# Altium PCB pcb.PcbDoc
Units mm, origin at the board's own origin, x right, y up, seen from the top; angles counter-clockwise.
Board outline 98.75 x 72 mm, 2 copper layers (Top Layer, Bottom Layer); 49 components, 41 nets, 141 pads, 26 vias.
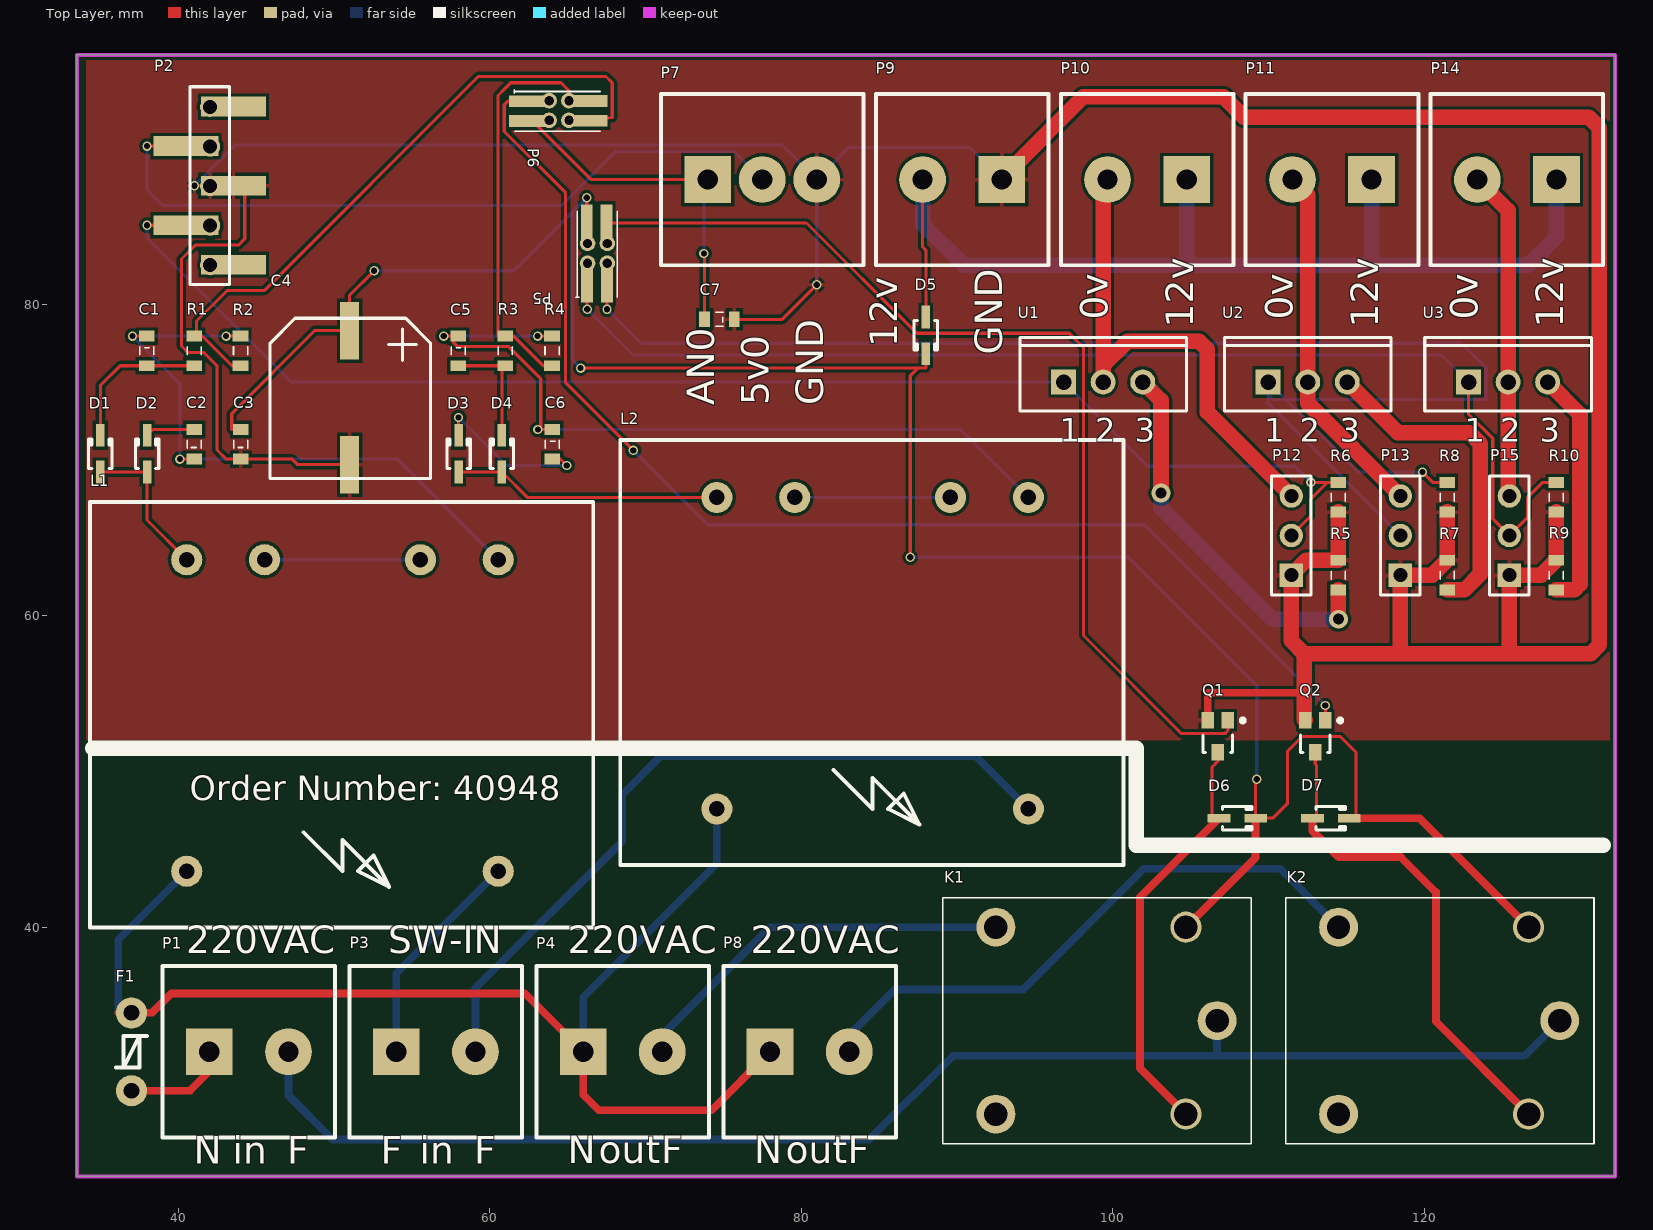
[diagram p0: Top Layer view]
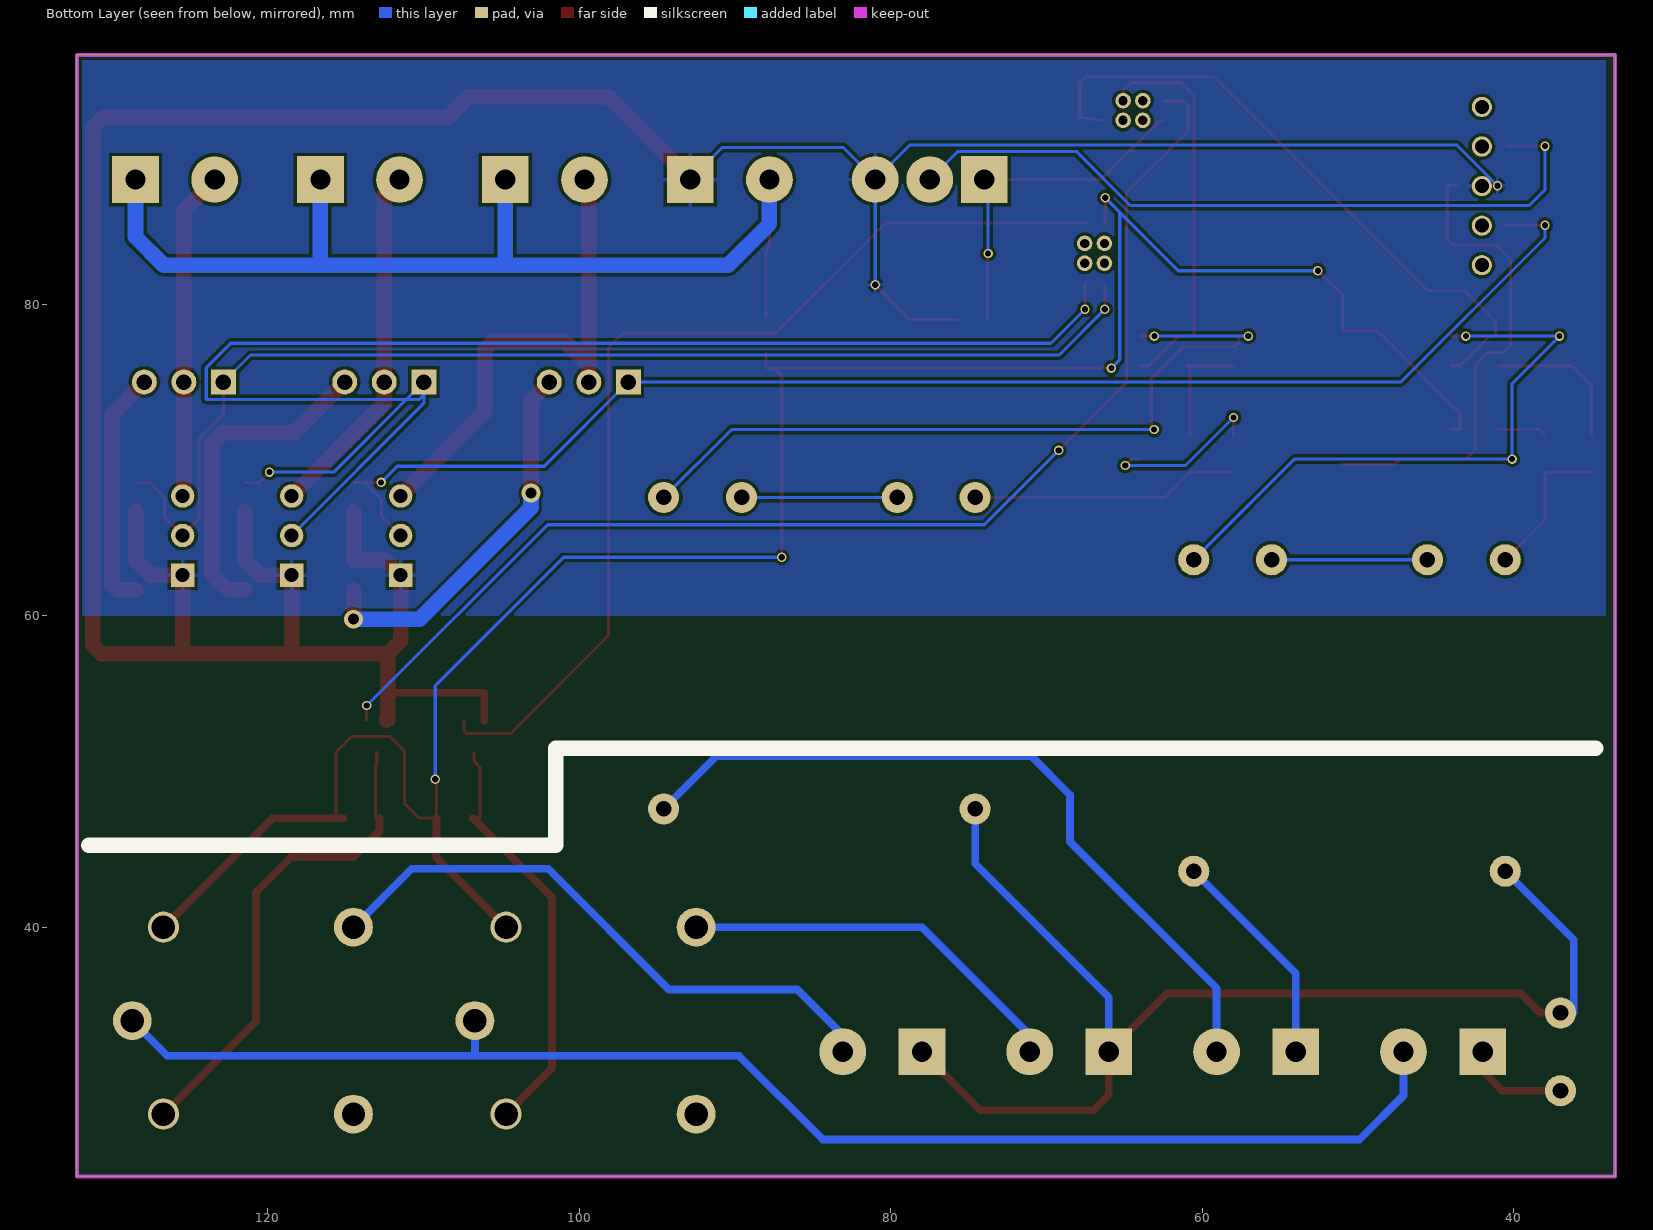
[diagram p1: Bottom Layer view, seen from below]
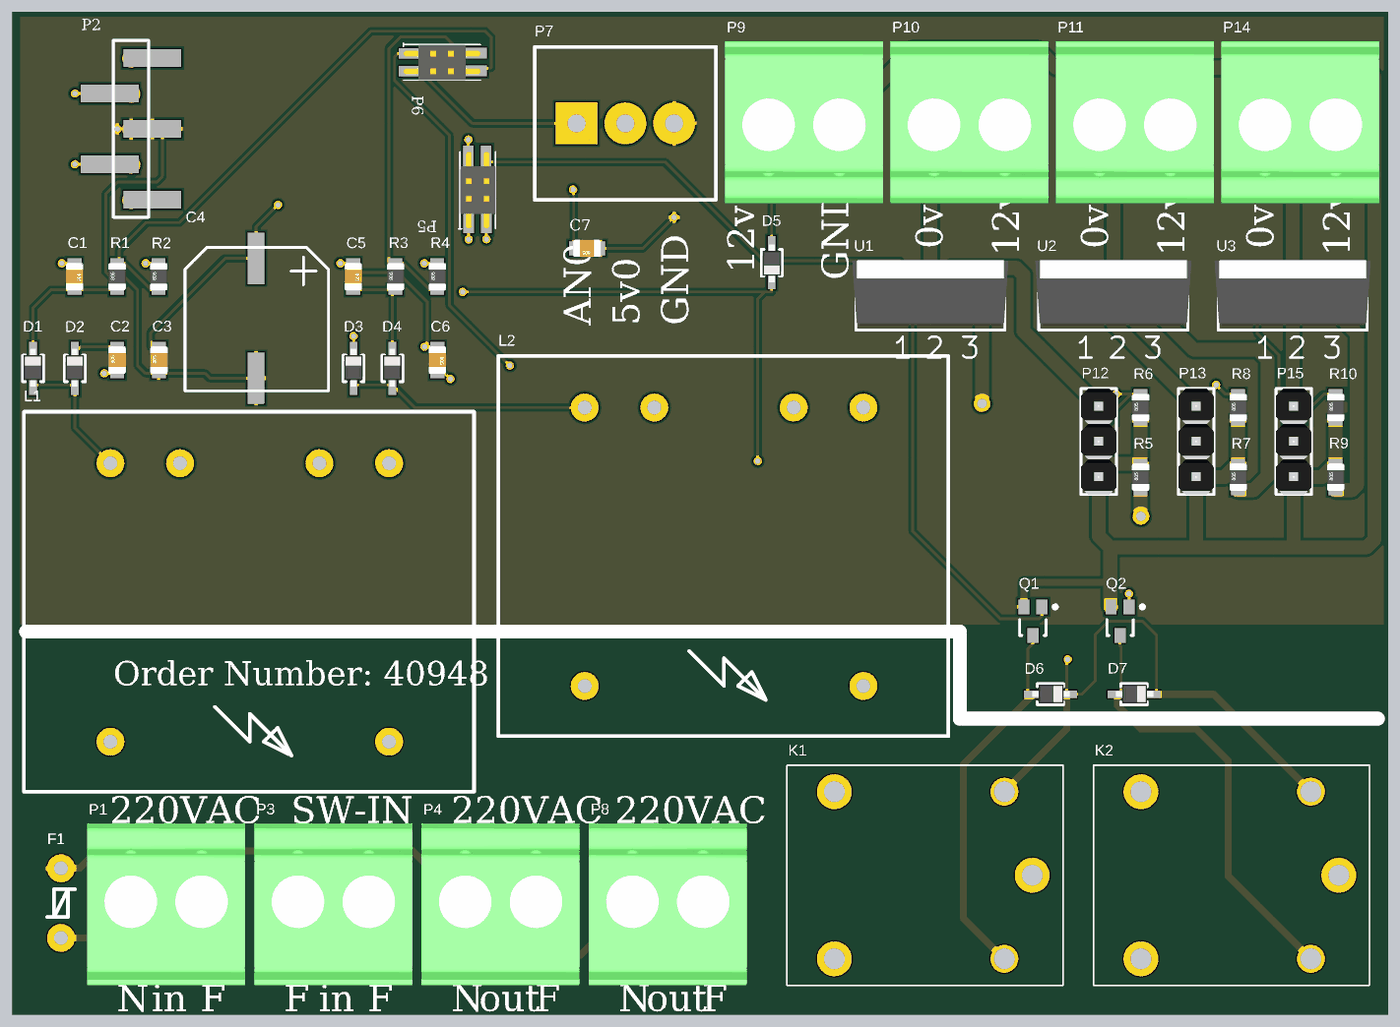
[diagram p2: 3D render of the assembled board from above, using the file's embedded part models]

## Layer stack, top to bottom
Top Layer: signal copper 0.0356
Dielectric: dielectric 0.32, FR-4, Dk 4.8
Bottom Layer: signal copper 0.0356

## Board outline
33.5,24 33.5,96 132.25,96 132.25,24

## Design rules (kind name [scope] priority, off if disabled: settings)
Clearance "Schematic Clearance Constraint_5" [InNet('NetF1_2')] p1: gap=2
Clearance "Schematic Clearance Constraint_4" [InNet('NetP3_2')] p2: gap=2
Clearance "Schematic Clearance Constraint_3" [InNet('HV_NEUTRAL')] p3: gap=2
Clearance "Schematic Clearance Constraint_2" [InNet('HV_FASE_OUT_TRANSFORMER')] p4: gap=2
Clearance "Schematic Clearance Constraint_1" [InNet('HV_FASE')] p5: gap=2
Clearance "Schematic Clearance Constraint" [InNet('NetP3_1')] p6: gap=2
Clearance "Schematic Clearance Constraint_6" [InNet('HV_FASE_OUT_FAN')] p7: gap=2
Clearance [All] p8: gap=0.2
ComponentClearance ComponentClearance_1 [(HasFootprint('TB2x6_5.08') OR HasFootprint('TB2x8_5.08'))] p1: gap=0 collisioncheckmode=3 verticalgap=0 showdistances=FALSE
ComponentClearance [All] p2: gap=0.254 collisioncheckmode=3 verticalgap=0.254 showdistances=FALSE
HoleToHoleClearance [All] p1: gap=0.2 allowstackedmicrovias=TRUE
MinimumAnnularRing [All] p1: minimumring=0.1
MinimumSolderMaskSliver [All] p1: minsoldermaskwidth=0.2
PolygonConnect [All] p1: connectstyle=Relief reliefconductorwidth=0.254 reliefentries=4 polygonreliefangle="90 Angle"
RoomDefinition "schakelaar wc" [InComponentClass('schakelaar wc')] p1: confinementstyle=ConfineIn formatcopy=TRUE lockcomponents=FALSE outline 0,0 50.8,0 50.8,25.4 0,25.4
RoomDefinition "schakelaar badkamer" [InComponentClass('schakelaar badkamer')] p2: confinementstyle=ConfineIn formatcopy=TRUE lockcomponents=FALSE outline 0,0 50.8,0 50.8,25.4 0,25.4
RoomDefinition "VENTILATOR BAD" [InComponentClass('VENTILATOR BAD')] p3: confinementstyle=ConfineIn formatcopy=TRUE lockcomponents=FALSE outline 134,203 176,203 176,220 134,220
RoomDefinition Urel2 [InComponentClass('Urel2')] p4: confinementstyle=ConfineIn formatcopy=TRUE lockcomponents=FALSE outline 134,103 171,103 171,127 134,127
RoomDefinition Urel1 [InComponentClass('Urel1')] p5: confinementstyle=ConfineIn formatcopy=TRUE lockcomponents=FALSE outline 134,78 170,78 170,102 134,102
RoomDefinition main [InComponentClass('main')] p6: confinementstyle=ConfineIn formatcopy=TRUE lockcomponents=FALSE outline 135,28.175 246,28.175 246,44.175 135,44.175
RoomDefinition "LEDS WC" [InComponentClass('LEDS WC')] p7: confinementstyle=ConfineIn formatcopy=TRUE lockcomponents=FALSE outline 78,200.95 120,200.95 120,216.95 78,216.95
RoomDefinition "LEDS BADKAMER" [InComponentClass('LEDS BADKAMER')] p8: confinementstyle=ConfineIn formatcopy=TRUE lockcomponents=FALSE outline 41,158.95 82,158.95 82,174.95 41,174.95
RoutingVias [All] p1: holewidth=0.4 width=0.6 viastyle="Through Hole" minholewidth=0.4 minwidth=0.6 maxholewidth=3 maxwidth=5
SilkToSilkClearance [All] p1: silktosilkclearance=0.2
SilkscreenOverComponentPads [All] p1 off: minsilkscreentomaskgap=0.254
SolderMaskExpansion [All] p1: expansion=0.102
Width [All] p1: maxlimit=16 minlimit=0.2 preferedwidth=0.2
23 further rules are at their usual default settings.

## Classes and differential pairs
component class "VENTILATOR BAD": P10 P12 R5 R6 U1
component class "LEDS WC": P11 P13 R7 R8 U2
component class "LEDS BADKAMER": P14 P15 R9 R10 U3
component class main: C3 C4 C7 D5 F1 P1 P2 P3 P4 P7 P8 P9
channel class schakelaarDetectie: U_schakelaarDetectie1 U_schakelaarDetectie2
component class "schakelaar badkamer": C5 C6 D3 D4 L2 R3 R4
component class "schakelaar wc": C1 C2 D1 D2 L1 R1 R2
component class Urel1: D7 K2 Q2
component class Urel2: D6 K1 Q1
channel class "FET PWM output": FET2 FET3 Ufet1
channel class outputRelay: Urel1 Urel2

## Components (designator, comment, footprint, x,y, rotation, side; value= is the part's Value field where it differs from the comment)
C1 "100n" C0805 38,77 r270 top (schematic designator C4)
C2 "100n" C0805 41,71 r90 top (schematic designator C3)
C3 "2u2" C0805 44,71 r90 top (schematic designator C2)
C4 "330uF" "SMT CASE G" 51,74 r90 top (schematic designator C1)
C5 "100n" C0805 58,77 r270 top (schematic designator C4)
C6 "100n" C0805 64.04,71 r270 top (schematic designator C3)
C7 "100n" C0805 74.75,79 r180 top (schematic designator C100)
D1 "60v 1A" SOD323 35,70.4 r90 top (schematic designator D3)
D2 "60v 1A" SOD323 38,70.4 r90 top
D3 "60v 1A" SOD323 58,70.4 r90 top (schematic designator D2)
D4 "60v 1A" SOD323 60.785,70.4 r90 top (schematic designator D3)
D5 "60v 1A" SOD323 88,78 r270 top (schematic designator D1)
D6 "60v 1A" SOD323 108,47 r0 top (schematic designator D4)
D7 "60v 1A" SOD323 114,47 r0 top (schematic designator D4)
F1 "220VAC 0.4A" Rachem_R8 37,32 r270 top
K1 "Relay SPDT" RELAY-G5LA-1 99,34 r180 top
K2 "Relay SPDT" RELAY-G5LA-1 121,34 r180 top (schematic designator K1)
L1 "transformer_dual_output" transformer_Block_1.5VA 50.546,53.594 r90 top
L2 "transformer_dual_output" transformer_Block_1.5VA 84.582,57.594 r90 top (schematic designator L1)
P1 "HV 220VAC input" TB2_5.08 42,32 r0 top (schematic designator P6)
P2 "Pin Header" "HDR1X5 SMT" 42.025,82.53 r90 top (schematic designator P4)
P3 "HV Buttons inputs (fase)" TB2_5.08 54,32 r0 top (schematic designator P5)
P4 "HV 220VAC output (to transformer 12v)" TB2_5.08 66,32 r0 top (schematic designator P7)
P5 "Pin Header" HDR2X2-SMT-1.27 66.255,81.307 r0 top (schematic designator P1)
P6 "Pin Header" HDR2X2-SMT-1.27 62.45,93.03 r270 top (schematic designator P3)
P7 "HUMIDITY SENSOR" TB3_3.5 74,88 r0 top (schematic designator P2)
P8 "HV 220VAC output to FAN" TB2_5.08 78,32 r0 top (schematic designator P9)
P9 "12v geschakeld IN" TB2_5.08 92.873,88 r180 top (schematic designator P8)
P10 "12v PWM out" TB2_5.08 104.746,88 r180 top
P11 "12v PWM out" TB2_5.08 116.619,88 r180 top (schematic designator P10)
P12 "Pin Header" PH1x3_2.54 111.468,62.607 r90 top (schematic designator P11)
P13 "Pin Header" PH1x3_2.54 118.468,62.607 r90 top (schematic designator P11)
P14 "12v PWM out" TB2_5.08 128.492,88 r180 top (schematic designator P10)
P15 "Pin Header" PH1x3_2.54 125.468,62.607 r90 top (schematic designator P11)
Q1 "w/internal Res" SOT-323-NPN 106.75,52.25 r180 top
Q2 "w/internal Res" SOT-323-NPN 113,52.25 r180 top (schematic designator Q1)
R1 "RESISTOR" R0805 41.02,77 r90 top
R2 "RESISTOR" R0805 44,77 r90 top
R3 "RESISTOR" R0805 61,77 r90 top (schematic designator R1)
R4 "RESISTOR" R0805 64,77 r90 top (schematic designator R2)
R5 "RESISTOR" R0805 114.468,62.607 r90 top (schematic designator R4)
R6 "RESISTOR" R0805 114.468,67.607 r90 top (schematic designator R3)
R7 "RESISTOR" R0805 121.468,62.607 r90 top (schematic designator R4)
R8 "RESISTOR" R0805 121.468,67.607 r90 top (schematic designator R3)
R9 "RESISTOR" R0805 128.468,62.607 r90 top (schematic designator R4)
R10 "RESISTOR" R0805 128.468,67.607 r90 top (schematic designator R3)
U1 "IRF540PBF" TO-220AB 99.387,75 r0 top
U2 "IRF540PBF" TO-220AB 112.52,75 r0 top (schematic designator U1)
U3 "IRF540PBF" TO-220AB 125.387,75 r0 top (schematic designator U1)

## Footprints (in the part's own frame and the unit in brackets; to place one, negate y for a bottom-side part, rotate by r counter-clockwise, add the part's x,y. Pads: shape width x height; smd on the part's side, far side on the other; paste and mask are expansions set on the pad)
C0805 [mm] "Chip Capacitor; Body 2.0 x 1.2 mm (LxW typ)"
  rect 0.7x1 smd: 1(-0.95,-0.025) 2(0.95,-0.025)
  silkscreen extent -0.25,-0.48 0.25,0.43, body extent -1,-0.65 1,0.6, height 0.78
"HDR1X5 SMT" [mil] "Connector; Header; 5 Position; SMT"
  rect 50x163.39 smd: 1(400,-60) 2(300,60) 3(200,-60) 4(100,60) 5(0,-60)
  silkscreen extent -50,-50 450,50
HDR2X2-SMT-1.27 [mm]
  rect 0.76x2.4 smd: 1(0,0) 2(-0.025,3.9) 3(1.275,0) 4(1.25,3.9)
  silkscreen extent -0.73,-0.87 1.93,4.65, body extent -0.62,-0.85 1.92,4.65, height 4.5
PH1x3_2.54 [mm] "Connector; Header; 3 Position"
  rect 1.5x1.5 hole 0.9: 1(0,0)
  round 1.5 hole 0.9: 2(2.54,0) 3(5.08,0)
  silkscreen extent -1.27,-1.27 6.35,1.27, body extent -1.27,-1.27 6.35,1.27, height 8.38
R0805 [mm] "0805 SMD Resistor"
  rect 0.7x1 smd: 1(-0.95,0) 2(0.95,0)
  silkscreen extent -0.25,-0.45 0.25,0.45, body extent -1.01,-0.63 0.99,0.62, height 0.78
Rachem_R8 [mm]
  round 2 hole 1: 1(-2.5,0) 2(2.5,0)
  silkscreen extent -1,-1 1,1
RELAY-G5LA-1 [mm] "Relay"
  round 2.5 hole 1.5: 1(-7.7,0) 2(6.5,6) 3(6.5,-6)
  round 2 hole 1.5: 4(-5.7,6) 5(-5.7,-6)
  silkscreen extent -9.9,-7.9 9.9,7.9, body extent -9.8,-7.8 9.8,7.8, height 15.8
"SMT CASE G" [mm]
  rect 3.7x1.2 smd: 1(-4.3,0) 2(4.3,0)
  silkscreen extent -5.2,-5.2 5.1,5.1
SOD323 [mm] "SOD-323/SC-76; 2 Leads; Body 1.7 x 1.3 mm, (LxW)"
  rect 1.45x0.55 smd: 1(-1.175,0) 2(1.175,0)
  silkscreen extent -0.95,-0.75 0.95,0.75, body extent -1.3,-0.66 1.4,0.69, height 0.79
SOT-323-NPN [mm] "SOT-323/SC-70; 3 Leads; Body 2.2 x 2.2 mm, inc. leads (LxW max)"
  rect 0.8x1.05 smd: B(-0.65,-1.025) C(0,1.025) E(0.65,-1.025)
  silkscreen extent -1.73,-1.15 0.95,1.03
TB2_5.08 [mm] "Terminal Block 2 Pin 5.08"
  rect 3x3 hole 1.3: 1(0,0)
  round 3 hole 1.3: 2(5.08,0)
  silkscreen extent -3,-5.5 8.08,5.5, body extent -3.12,-5.9 8.22,5.72, height 18
TB3_3.5 [mm] "Terminal Block 3 Pin 3.5mm"
  rect 3x3 hole 1.3: 1(0,0)
  round 3 hole 1.3: 2(3.5,0) 3(7,0)
  silkscreen extent -3,-5.5 10,5.5, body extent -3,-5.5 10,5.5, height 12.8
TO-220AB [mm] "TO, Thru-Hole, Vertical, Heatsink Mounted; 3 In-Line Leads; Pitch 2.54 mm"
  rect 1.6x1.6 hole 1: 1(-2.54,0)
  round 1.6 hole 1: 2(0,0) 3(2.54,0)
  silkscreen extent -5.35,-1.85 5.35,2.85, body extent -5.61,-1.52 5.61,3.17, height 19.33
transformer_Block_1.5VA [mm]
  round 2 hole 1: 1(-10,10) 2(-10,-10) 3(10,-10) 4(10,-5) 5(10,5) 6(10,10)
  silkscreen extent -13.6,-16.1 13.7,16.2

## Part data
C4: library part 330uF-Electrolytic, "Capacitor"
D1 D2 D3 D4 D5 D6 D7: library part PMEG6010CEJ
F1: library part LVR040K, "Fuse"
K1 K2: library part G5LA-14, "Relay, Single-Pole Dual-Throw Relay"
L1 L2: library part transformer_220VAC, "Inductor"
P1 P3 P4 P8 P9 P10 P11 P14: library part TB2, "Con1x2"
P2: library part "PH1x5 SMT", "Con1x5"
P5 P6: library part PH2x2-SMT-1.27, "Header, 2-Pin, Dual row"
P7: library part TB3, "Con1x3"
P12 P13 P15: library part PH1x3, "Con1x3"
Q1 Q2: library part PDTC124TU, "Transistor"
R1 R3 R6 R8 R10: library part 10K, "Resistor"
R2 R4: library part 5K6, "Resistor"
R5 R7 R9: library part 0R, "Resistor"
U1 U2 U3: "Transistor"

## Free pads (board coordinates)
  round 1 hole 0.6: 1(65.086,91.799) 1(67.55,82.63) 2(63.816,91.799) 2(66.28,82.63) 3(65.086,93.069) 3(66.28,83.9) 3(67.55,83.9) 4(63.816,93.069)
  round 1.3 hole 0.9: 5(42.048,82.503) 6(42.048,85.043) 7(42.048,87.583) 8(42.048,90.123) 9(42.048,92.663)

## Via types
v1: diameter 0.6, hole 0.4, Top Layer to Bottom Layer, 24 vias
v2: diameter 1.2, hole 0.7, Top Layer to Bottom Layer, 2 vias

## Nets (pads, with @x,y where several pads share a name; then routed paths per layer and width w, separated by ;. In a path a pad name is that pad's centre, name@x,y a point inside that pad or via, vN(x,y) a via of type N, cw(c..) or ccw(c..) an arc to the next point about the centre after c; other vN are vias at no path point)
5V0: P2.2 P7.2 pad.8 | length 47.4
  Top Layer w0.2: v1(37.998,90.15) P2.2
  Bottom Layer w0.2: v1(37.998,90.15) 37.998,87.351 39.014,86.335 64.614,86.335 68.093,89.814 75.686,89.814 P7.2
12V: C3.2 C4.2 D5.2 D6.2 D7.2 K1.5 K2.5 P5.2 pad.3@66.28,83.9 | length 154.5
  Top Layer w0.2: C3.2 43.434,71.95 43.434,72.974 48.768,78.308 C4.2@51,78.308 ; C4.2 C4.2@51,78.308 ; v1(52.578,82.144) 51,80.566 C4.2@51,78.308 ; v1(65.837,75.895) 87.5,75.895 ; P5.2 v1(66.23,86.834) ; v1(87,63.75) 87,75.395 87.5,75.895 ; D5.2 88,75.895 87.5,75.895 ; 109.175,44.475 D6.2 ; v1(109.25,49.5) 109.175,49.425 D6.2 ; D7.2 115.621,47 115.621,51.232 114.605,52.248 112.166,52.248 111.227,51.308 111.227,47.955 110.271,47 D6.2
  Top Layer w0.5: K1.5 109.175,44.475 D6.2 ; D7.2 119.7,47 K2.5
  Bottom Layer w0.2: v1(52.578,82.144) 61.54,82.144 v1(66.23,86.834) ; 65.3,85.904 65.3,76.432 v1(65.837,75.895) ; v1(87,63.75) 101,63.75 109.25,55.5 v1(109.25,49.5)
"12V_schakelaar badkamer": C6.2 D3.2 | length 10.5
  Top Layer w0.2: D3.2 v1(58,72.72) ; C6.2 64.545,70.05 v1(64.948,69.647)
  Bottom Layer w0.2: v1(58,72.72) 61.073,69.647 v1(64.948,69.647)
"12V_schakelaar wc": C2.2 D2.2 | length 3.2
  Top Layer w0.2: D2.2 38.375,71.95 C2.2
12VRAW: D5.1 P9.2 P10.1 P11.1 P14.1 | length 68.7
  Top Layer w0.2: P9.2 87.793,83.671 88,83.464 D5.1
  Bottom Layer w1: P9.2 87.793,85.157 90.45,82.5 126.675,82.5 128.492,84.317 P14.1 ; 104.746,82.671 P10.1 ; 116.619,82.631 P11.1
AN9/RB15: P6.4 pad.1@65.086,91.799 R1.2 R2.1 | length 41.9
  Top Layer w0.2: R1.2 R1.2@41.173,77.95 ; R2.1 43.454,76.05 41.554,77.95 R1.2@41.173,77.95 ; P6.4 67.869,91.983 67.869,94.209 67.462,94.615 59.258,94.615 45.517,80.874 43.129,80.874 41.173,78.918 R1.2@41.173,77.95
AN10/INT1/RB14: P6.2 pad.3@65.086,93.069 R3.2 R4.1 | length 25.4
  Top Layer w0.2: R4.1 63.444,76.05 61.544,77.95 R3.2 60.528,77.95 60.528,93.396 60.96,93.828 61.347,94.215 64.575,94.215 65.086,93.704 pad.3@65.086,93.069
DONOTUSE1: P2.1 pad.9
GND: C3.1 C4.1 C7.1 P2.3 P7.3 P9.1 P12.1 P13.1 P15.1 pad.7 Q1.E Q2.E R5.2 R6.1 R7.2 R8.1 R9.2 R10.1 | length 244.4
  Top Layer w0.2: v1(41.046,87.605) 41.052,87.61 P2.3@42.951,87.61 ; P2.3 44.275,87.61 44.275,84.2 43.87,83.795 41.097,83.795 40.208,82.906 40.208,77.318 40.64,76.886 41.656,76.886 42.494,76.048 42.494,70.634 43.078,70.05 C3.1 47.32,70.05 47.67,69.7 C4.1 ; C7.1 78.775,79.025 v1(81,81.25)
  Top Layer w0.5: Q1.E 106.1,55.05 111.875,55.05 112.3,54.625 112.35,54.575 Q2.E
  Top Layer w1: P9.1 92.873,88.073 98.125,93.325 107.1,93.325 108.425,92 130.575,92 131.25,91.325 131.25,58.125 130.675,57.55 112.3,57.55 ; Q2.E 112.3,53.325 112.3,54.625 112.3,57.55 ; R6.1 R5.2 112.418,63.557 P12.1 111.468,58.382 112.3,57.55 ; 118.468,57.657 P13.1 120.518,62.607 R7.2 R8.1 ; 125.468,57.593 P15.1 127.518,62.607 R9.2 R10.1
  Bottom Layer w0.2: v1(41.046,87.605) 43.663,90.221 78.779,90.221 P7.3 ; v1(81,81.25) P7.3 ; P9.1 90.805,90.068 83.068,90.068 P7.3
"GND_schakelaar badkamer": C5.1 C6.1 L2.3 R4.2 | length 52.3
  Top Layer w0.2: v1(57.051,77.95) C5.1@57.683,77.95 ; C5.1 C5.1@57.683,77.95 ; v1(63.073,77.95) R4.2 ; v1(63.094,71.958) 63.102,71.95 v1@63.28,71.95 ; C6.1 v1@63.28,71.95 ; C5.1@57.683,77.95 57.683,77.521 57.912,77.292 61.189,77.292 63.28,75.201 v1@63.28,71.95
  Bottom Layer w0.2: v1(57.051,77.95) v1(63.073,77.95) ; v1(63.094,71.958) 90.218,71.958 L2.3
"GND_schakelaar wc": C1.1 C2.1 L1.3 R2.2 | length 41
  Top Layer w0.2: v1(37.061,77.95) C1.1 ; v1(40.107,70.053) 40.11,70.05 C2.1 ; v1(43.073,77.95) R2.2
  Bottom Layer w0.2: v1(43.073,77.95) v1(37.061,77.95) 40.107,74.905 v1(40.107,70.053) 54.087,70.053 L1.3
HV_FASE: K1.1 K2.1 P1.2 | length 91
  Bottom Layer w0.5: P1.2 47.08,29.197 49.9,26.377 84.377,26.377 89.75,31.75 126.45,31.75 K2.1 ; K1.1 106.7,31.8 106.75,31.75
HV_FASE_OUT_FAN: K2.3 P8.2 | length 38.5
  Bottom Layer w0.5: P8.2 83.08,33.08 86,36 94.25,36 102,43.75 110.75,43.75 K2.3
HV_FASE_OUT_TRANSFORMER: K1.3 P4.2 | length 25.4
  Bottom Layer w0.5: P4.2 71.08,33.08 78,40 K1.3
HV_NEUTRAL: F1.1 L1.1 L2.1 P4.1 P8.1 | length 78.7
  Top Layer w0.5: F1.1@36.15,34.5 38.318,34.5 39.568,35.75 62.25,35.75 P4.1 66,29.25 67,28.25 74.25,28.25 P8.1
  Bottom Layer w0.5: F1.1@36.15,34.5 36.15,39.198 L1.1 ; P4.1 66,35.5 74.582,44.082 L2.1
NetC1_2: C1.2 D1.2 R1.1 | length 9.7
  Top Layer w0.2: D1.2 35,74.778 36.272,76.05 C1.2 R1.1
NetC5_2: C5.2 D4.2 R3.1 | length 7.5
  Top Layer w0.2: C5.2 R3.1@60.785,76.05 ; D4.2 R3.1@60.785,76.05 ; R3.1 R3.1@60.785,76.05
NetD1_1: D1.1 D2.1 L1.6 | length 9.7
  Top Layer w0.2: D1.1 D2.1 38,66.14 L1.6
NetD3_1: D3.1 D4.1 L2.6 | length 17.3
  Top Layer w0.2: D3.1 D4.1 62.416,67.594 L2.6
NetD6_1: D6.1 K1.4 Q1.C | length 27.2
  Top Layer w0.2: Q1.C 106.75,50.648 106.375,50.273 106.375,47 D6.1
  Top Layer w0.5: K1.4 101.75,30.95 101.75,41.925 D6.1
NetD7_1: D7.1 K2.4 Q2.C | length 31.6
  Top Layer w0.2: D7.1 113.081,47 113.081,50.394 113,50.474 Q2.C
  Top Layer w0.5: D7.1 112.825,46.175 114.5,44.5 118.5,44.5 120.75,42.25 120.75,33.95 K2.4
NetF1_2: F1.2 P1.1 | length 6.8
  Top Layer w0.5: F1.2 40.75,29.5 42,30.75 P1.1
NetK1_2: K1.2
NetK2_2: K2.2
NetL1_4: L1.4 L1.5 | length 10
  Bottom Layer w0.2: L1.5 L1.4
NetL2_4: L2.4 L2.5 | length 10
  Bottom Layer w0.2: L2.5 L2.4
NetP3_1: L1.2 P3.1 | length 14.3
  Bottom Layer w0.5: P3.1 54,37.048 L1.2
NetP3_2: L2.2 P3.2 | length 48.9
  Bottom Layer w0.5: P3.2 59.08,36.08 68.5,45.5 68.5,48.5 71,51 91.176,51 L2.2
NetR5_1: R5.1 U1.3 | length 24.8
  Top Layer w1: U1.3 103.1,73.827 v2(103.1,67.875) ; R5.1 114.468,59.807 v2(114.5,59.775)
  Bottom Layer w1: v2(103.1,67.875) 103.1,66.925 110.25,59.775 v2(114.5,59.775)
NetR7_1: R7.1 U2.3 | length 21.1
  Top Layer w1: U2.3 118.31,71.75 122.9,71.75 123.6,71.05 123.6,62.675 122.582,61.657 R7.1
NetR9_1: R9.1 U3.3 | length 15.5
  Top Layer w1: U3.3 130,72.927 130,62.025 129.632,61.657 R9.1
"OUTPUT_LEDS BADKAMER": P14.2 P15.3 U3.2 | length 21.2
  Top Layer w1: P14.2 125.387,86.025 U3.2 125.387,67.768 P15.3
"OUTPUT_LEDS WC": P11.2 P13.3 U2.2 | length 23.2
  Top Layer w1: P11.2 112.52,87.019 U2.2 112.52,73.635 P13.3
"OUTPUT_VENTILATOR BAD": P10.2 P12.3 U1.2 | length 32.3
  Top Layer w1: U1.2 99.387,76.062 ; P10.2 99.387,87.721 99.387,76.062 ; P12.3 106.075,73.08 106.075,77.1 105.55,77.625 100.95,77.625 99.387,76.062
PGC/SCL/SDO: P2.5 pad.5
PGD/SDA/SCK: P2.4 P12.2 pad.6 R6.2 U1.1 | length 90.7
  Top Layer w0.2: v1(37.998,85.065) 38.004,85.07 P2.4 ; P12.2 112.7,66.379 112.7,67.465 113.792,68.557 ; v1(112.725,68.557) 113.792,68.557 ; R6.2 113.792,68.557
  Bottom Layer w0.2: v1(37.998,85.065) 37.998,84.252 47.25,75 U1.1 102.251,69.596 111.686,69.596 v1(112.725,68.557)
PWM1/RB10: P5.1 P15.2 pad.2@66.28,82.63 R10.2 U3.1 | length 76.3
  Top Layer w0.2: v1(66.255,79.668) P5.1 ; U3.1 122.847,72.935 124.4,71.381 124.4,66.215 P15.2 126.619,66.298 126.619,67.566 127.61,68.557 R10.2
  Bottom Layer w0.2: v1(66.255,79.668) 69.19,76.733 121.113,76.733 U3.1
PWM2/RB11: P5.3 P13.2 pad.1@67.55,82.63 R8.2 U2.1 | length 103.3
  Top Layer w0.2: v1(67.53,79.68) P5.3 ; v1(119.888,69.217) 120.548,68.557 R8.2
  Bottom Layer w0.2: v1(67.53,79.68) 69.714,77.495 122.377,77.495 123.952,75.921 123.952,73.889 111.092,73.889 ; P13.2 109.98,73.635 109.98,74.168 ; v1(119.888,69.217) 115.763,69.217 111.092,73.889 ; 109.98,74.168 U2.1 111.092,73.889 ; 109.98,74.168 110.26,73.889 111.092,73.889
RB13: P5.4 pad.3@67.55,83.9 Q1.B | length 65.1
  Top Layer w0.2: P5.4 67.505,85.217 80.34,85.217 87.427,78.13 97.206,78.13 98.12,77.216 98.12,58.725 104.419,52.426 107.197,52.426 107.4,52.629 Q1.B
VREF+/AN0/RA0: C7.2 P6.3 P7.1 pad.2@63.816,91.799 | length 22.2
  Top Layer w0.2: P6.3 62.77,91.755 66.525,88 P7.1 ; v1(73.75,83.25) 73.8,83.2 C7.2
  Bottom Layer w0.2: v1(73.75,83.25) 73.75,87.75 P7.1
VREF-/AN1/RA0: P6.1 pad.4 Q2.B | length 79.4
  Top Layer w0.2: P6.1 61.163,93.03 60.935,92.801 60.935,91.084 64.875,87.144 64.875,74.952 v1(69.215,70.612) ; v1(113.64,54.229) 113.65,54.219 Q2.B
  Bottom Layer w0.2: v1(69.215,70.612) 73.99,65.837 102.032,65.837 v1(113.64,54.229)

## Polygon pours and split planes (outlines as drawn)
GND on Bottom Layer "Top Overlay-No Net" (solid, pour order 3): 132.25,60 33.75,60 33.75,96 132.25,96
GND on Top Layer "Top Overlay-No Net" (solid, pour order 4): 132.25,52 34,52 34,96 132.25,96

## Keep-outs
Keep-Out Layer:
  the board outline again, w0.254

## Silkscreen, mask and mechanical layers (free items; w line width, h text height)
Top Overlay:
  lines w1: 34.5,51.5 101.5,51.5 101.5,45.25 131.5,45.25
  text "0v" at 100.254,79 h3 r90
  text "0v" at 112.127,79 h3 r90
  text "0v" at 124,79 h3 r90
  text "12v" at 105.754,78.5 h3 r90
  text "12v" at 117.627,78.5 h3 r90
  text "12v" at 129.5,78.5 h3 r90
  text "12v" at 86.75,77.25 h3 r90
  text "GND" at 93.5,76.75 h3 r90
  text "AN0" at 75,73.5 h3 r90
  text "5v0" at 78.5,73.5 h3 r90
  text "GND" at 82,73.5 h3 r90
  text "Order Number: 40948" at 40.75,47.65 h2.7
  text "220VAC" at 40.5,37.75 h3
  text "SW-IN" at 53.5,37.75 h3
  text "220VAC" at 65,37.75 h3
  text "220VAC" at 76.75,37.75 h3
  text "N" at 65,24.25 h3
  text "out" at 67,24.25 h3
  text "F" at 71,24.25 h3
  text "N" at 77,24.25 h3
  text "out" at 79,24.25 h3
  text "F" at 83,24.25 h3
  text "N" at 41,24.218 h3
  text "in" at 43.5,24.218 h3
  text "F" at 47,24.218 h3
  text "F" at 53,24.218 h3
  text "in" at 55.5,24.218 h3
  text "F" at 59,24.218 h3
Bottom Overlay:
  lines w1: 34.75,51.5 101.5,51.5 101.5,45.25 131.5,45.25
Mechanical 1:
  lines w0.1: 33.55,80.81 69.7,80.81 69.7,93.81 33.55,93.81 33.55,80.81

## Text inside footprints (layer, text, board x,y; h text height)
U1: Top Overlay "3" at 101.427,71.175 h1.5; Top Overlay "1" at 96.597,71.175 h1.5; Top Overlay "2" at 98.887,71.175 h1.5
U2: Top Overlay "3" at 114.56,71.175 h1.5; Top Overlay "1" at 109.73,71.175 h1.5; Top Overlay "2" at 112.02,71.175 h1.5
U3: Top Overlay "3" at 127.427,71.175 h1.5; Top Overlay "1" at 122.597,71.175 h1.5; Top Overlay "2" at 124.887,71.175 h1.5